# Altium PCB RelayBoard.PcbDoc (part 1 of 2)
Units mm, origin at the board's own origin, x right, y up, seen from the top; angles counter-clockwise.
Board outline 355 x 125 mm, 2 copper layers (Top Layer, Bottom Layer); 146 components, 100 nets, 450 pads, 452 vias.
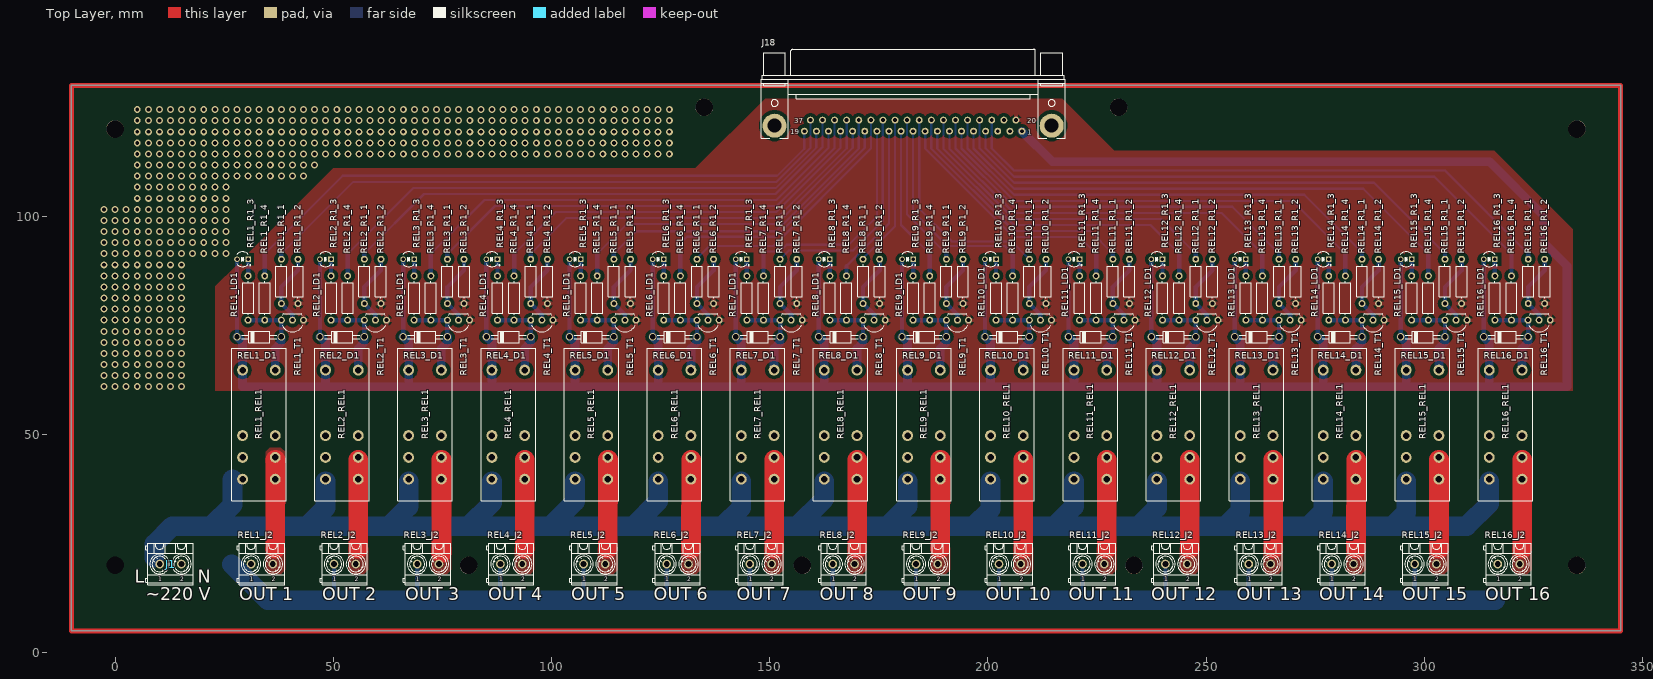
[diagram p0: Top Layer view]
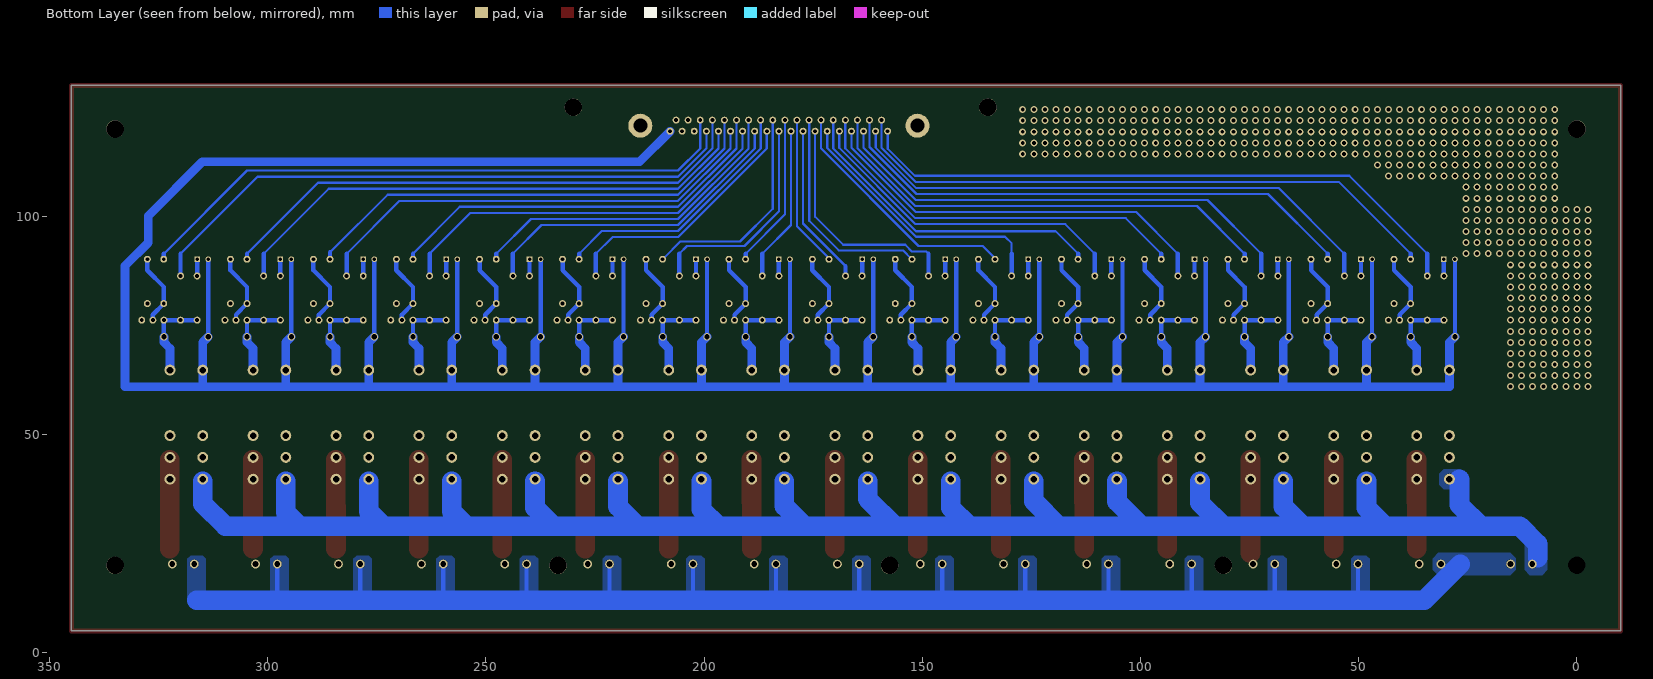
[diagram p1: Bottom Layer view, seen from below]
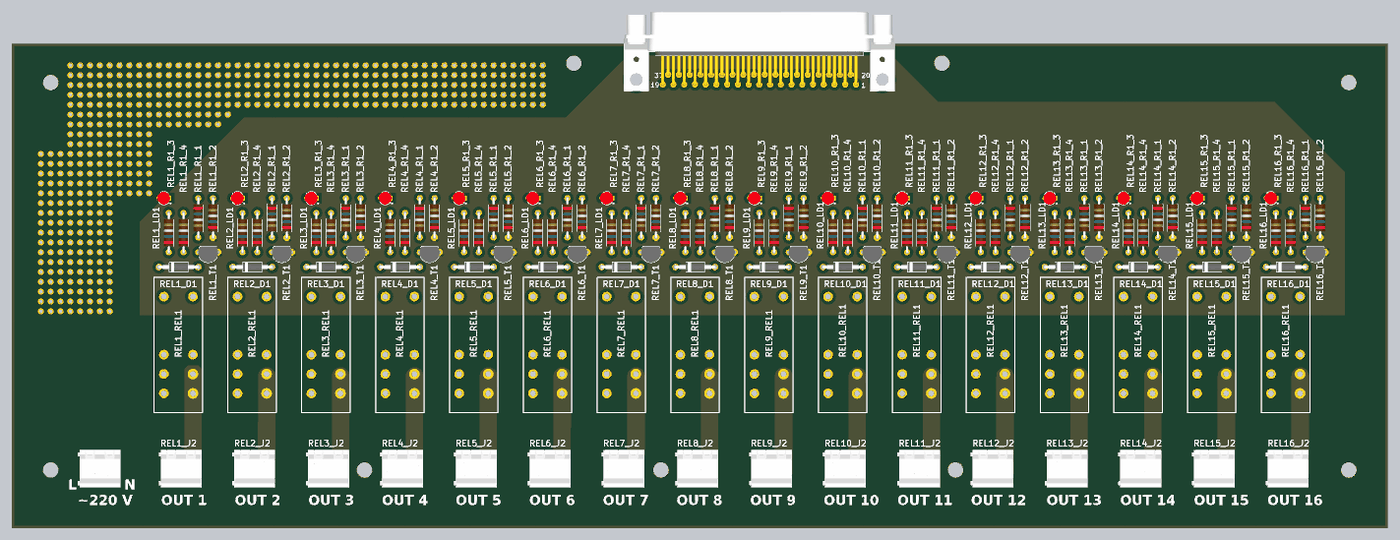
[diagram p3: 3D render of the assembled board from above, using the file's embedded part models]

## Layer stack, top to bottom
Top Solder: solder mask 0.0102, Solder Resist, Dk 3.5
Top Layer: signal copper 0.0356
Dielectric 1: dielectric 0.32, FR-4, Dk 4.8
Bottom Layer: signal copper 0.0356
Bottom Solder: solder mask 0.0102, Solder Resist, Dk 3.5

## Board outline
-10,5 -10,130 345,130 345,5

## Design rules (kind name [scope] priority, off if disabled: settings)
Clearance [InNet('GND')] p1: gap=0.8
PolygonConnect [InNet('GND')] p1: connectstyle=Relief reliefconductorwidth=1 reliefentries=4 polygonreliefangle="90 Angle" airgapwidth=0.5
RoomDefinition REL16 [InComponentClass('REL16')] p1: confinementstyle=ConfineIn formatcopy=TRUE lockcomponents=FALSE outline 310.475,15.24 330.16,15.24 330.16,104.775 310.475,104.775
RoomDefinition REL15 [InComponentClass('REL15')] p2: confinementstyle=ConfineIn formatcopy=TRUE lockcomponents=FALSE outline 291.425,15.24 311.11,15.24 311.11,104.775 291.425,104.775
RoomDefinition REL14 [InComponentClass('REL14')] p3: confinementstyle=ConfineIn formatcopy=TRUE lockcomponents=FALSE outline 272.415,15.24 292.1,15.24 292.1,104.775 272.415,104.775
RoomDefinition REL13 [InComponentClass('REL13')] p4: confinementstyle=ConfineIn formatcopy=TRUE lockcomponents=FALSE outline 253.405,15.24 273.09,15.24 273.09,104.775 253.405,104.775
RoomDefinition REL12 [InComponentClass('REL12')] p5: confinementstyle=ConfineIn formatcopy=TRUE lockcomponents=FALSE outline 234.315,15.24 254,15.24 254,104.775 234.315,104.775
RoomDefinition REL11 [InComponentClass('REL11')] p6: confinementstyle=ConfineIn formatcopy=TRUE lockcomponents=FALSE outline 215.305,15.24 234.99,15.24 234.99,104.775 215.305,104.775
RoomDefinition REL10 [InComponentClass('REL10')] p7: confinementstyle=ConfineIn formatcopy=TRUE lockcomponents=FALSE outline 196.175,15.24 215.86,15.24 215.86,104.775 196.175,104.775
RoomDefinition REL9 [InComponentClass('REL9')] p8: confinementstyle=ConfineIn formatcopy=TRUE lockcomponents=FALSE outline 177.165,15.24 196.85,15.24 196.85,104.775 177.165,104.775
RoomDefinition REL8 [InComponentClass('REL8')] p9: confinementstyle=ConfineIn formatcopy=TRUE lockcomponents=FALSE outline 158.075,15.24 177.76,15.24 177.76,104.775 158.075,104.775
RoomDefinition REL6 [InComponentClass('REL6')] p10: confinementstyle=ConfineIn formatcopy=TRUE lockcomponents=FALSE outline 120.015,15.24 139.7,15.24 139.7,104.775 120.015,104.775
RoomDefinition REL5 [InComponentClass('REL5')] p11: confinementstyle=ConfineIn formatcopy=TRUE lockcomponents=FALSE outline 100.965,15.24 120.65,15.24 120.65,104.775 100.965,104.775
RoomDefinition REL4 [InComponentClass('REL4')] p12: confinementstyle=ConfineIn formatcopy=TRUE lockcomponents=FALSE outline 81.915,15.24 101.6,15.24 101.6,104.775 81.915,104.775
RoomDefinition REL3 [InComponentClass('REL3')] p13: confinementstyle=ConfineIn formatcopy=TRUE lockcomponents=FALSE outline 62.825,15.24 82.51,15.24 82.51,104.775 62.825,104.775
RoomDefinition REL2 [InComponentClass('REL2')] p14: confinementstyle=ConfineIn formatcopy=TRUE lockcomponents=FALSE outline 43.775,15.24 63.46,15.24 63.46,104.775 43.775,104.775
RoomDefinition REL1 [InComponentClass('REL1')] p15: confinementstyle=ConfineIn formatcopy=TRUE lockcomponents=FALSE outline 24.765,15.24 44.45,15.24 44.45,104.775 24.765,104.775
RoomDefinition REL7 [InComponentClass('REL7')] p16: confinementstyle=ConfineIn formatcopy=TRUE lockcomponents=FALSE outline 139.065,15.24 158.75,15.24 158.75,104.775 139.065,104.775
RoutingVias [All] p1: holewidth=0.711 width=1.27 viastyle="Through Hole" minholewidth=0.711 minwidth=1.27 maxholewidth=0.711 maxwidth=1.27
SolderMaskExpansion [All] p1: expansion=0.102
Width [InNetClass('HighCurrent')] p1: maxlimit=5 minlimit=1 preferedwidth=4.5
29 further rules are at their usual default settings.

## Classes and differential pairs
net class R[1..16]: R1 R2 R3 R4 R5 R6 R7 R8 R9 R10 R11 R12 R13 R14 R15 R16
component class REL16: REL16_D1 REL16_J2 REL16_LD1 REL16_R1_1 REL16_R1_2 REL16_R1_3 REL16_R1_4 REL16_REL1 REL16_T1
component class REL15: REL15_D1 REL15_J2 REL15_LD1 REL15_R1_1 REL15_R1_2 REL15_R1_3 REL15_R1_4 REL15_REL1 REL15_T1
component class REL14: REL14_D1 REL14_J2 REL14_LD1 REL14_R1_1 REL14_R1_2 REL14_R1_3 REL14_R1_4 REL14_REL1 REL14_T1
component class REL13: REL13_D1 REL13_J2 REL13_LD1 REL13_R1_1 REL13_R1_2 REL13_R1_3 REL13_R1_4 REL13_REL1 REL13_T1
component class REL12: REL12_D1 REL12_J2 REL12_LD1 REL12_R1_1 REL12_R1_2 REL12_R1_3 REL12_R1_4 REL12_REL1 REL12_T1
component class REL11: REL11_D1 REL11_J2 REL11_LD1 REL11_R1_1 REL11_R1_2 REL11_R1_3 REL11_R1_4 REL11_REL1 REL11_T1
net class LED[1..16]: LED1 LED2 LED3 LED4 LED5 LED6 LED7 LED8 LED9 LED10 LED11 LED12 LED13 LED14 LED15 LED16
channel class OneRealayNode: RELAY1 RELAY2 RELAY3 RELAY4 RELAY5 RELAY6 RELAY7 RELAY8 RELAY9 RELAY10
component class REL10: REL10_D1 REL10_J2 REL10_LD1 REL10_R1_1 REL10_R1_2 REL10_R1_3 REL10_R1_4 REL10_REL1 REL10_T1
component class REL9: REL9_D1 REL9_J2 REL9_LD1 REL9_R1_1 REL9_R1_2 REL9_R1_3 REL9_R1_4 REL9_REL1 REL9_T1
component class REL8: REL8_D1 REL8_J2 REL8_LD1 REL8_R1_1 REL8_R1_2 REL8_R1_3 REL8_R1_4 REL8_REL1 REL8_T1
component class REL7: REL7_D1 REL7_J2 REL7_LD1 REL7_R1_1 REL7_R1_2 REL7_R1_3 REL7_R1_4 REL7_REL1 REL7_T1
component class REL6: REL6_D1 REL6_J2 REL6_LD1 REL6_R1_1 REL6_R1_2 REL6_R1_3 REL6_R1_4 REL6_REL1 REL6_T1
component class REL5: REL5_D1 REL5_J2 REL5_LD1 REL5_R1_1 REL5_R1_2 REL5_R1_3 REL5_R1_4 REL5_REL1 REL5_T1
component class REL4: REL4_D1 REL4_J2 REL4_LD1 REL4_R1_1 REL4_R1_2 REL4_R1_3 REL4_R1_4 REL4_REL1 REL4_T1
component class REL3: REL3_D1 REL3_J2 REL3_LD1 REL3_R1_1 REL3_R1_2 REL3_R1_3 REL3_R1_4 REL3_REL1 REL3_T1
component class REL2: REL2_D1 REL2_J2 REL2_LD1 REL2_R1_1 REL2_R1_2 REL2_R1_3 REL2_R1_4 REL2_REL1 REL2_T1
component class REL1: REL1_D1 REL1_J2 REL1_LD1 REL1_R1_1 REL1_R1_2 REL1_R1_3 REL1_R1_4 REL1_REL1 REL1_T1
component class RelayBoard: J1 J18
net class HighCurrent: AC N NetREL1_J2_2 NetREL2_J2_2 NetREL3_J2_2 NetREL4_J2_2 NetREL5_J2_2 NetREL6_J2_2 NetREL7_J2_2 NetREL8_J2_2 NetREL9_J2_2 NetREL10_J2_2 NetREL11_J2_2 NetREL12_J2_2 NetREL13_J2_2 NetREL14_J2_2 NetREL15_J2_2 NetREL16_J2_2

## Components (designator, comment, footprint, x,y, rotation, side; value= is the part's Value field where it differs from the comment)
J1 "Terminal" WIELAND_25.161.0253.0 12.7,20.32 r0 top
J18 "D-Sub" AMPHENOL_L717DFC37P1ATN 182.88,120.777 r0 top
REL1_D1 "1N4001" DO-41 33.02,72.39 r0 top (schematic designator D1)
REL1_J2 "Terminal" WIELAND_25.161.0253.0 33.655,20.32 r0 top (schematic designator J2)
REL1_LD1 "Red" LED_3MM_RED_1C-2A 29.21,90.17 r180 top (schematic designator LD1)
REL1_R1_1 "1K" RES_ARCOL_RCC025 38.1,85.09 r270 top (schematic designator R1_1)
REL1_R1_2 "100K" RES_ARCOL_RCC025 41.91,85.09 r90 top (schematic designator R1_2)
REL1_R1_3 "510" RES_ARCOL_RCC025 30.48,81.28 r90 top (schematic designator R1_3)
REL1_R1_4 "510" RES_ARCOL_RCC025 34.29,81.28 r90 top (schematic designator R1_4)
REL1_REL1 "Relay" RP78602 29.21,64.77 r0 top (schematic designator REL1)
REL1_T1 "KSP2222A" TO-92AA-P254 40.64,76.2 r180 top (schematic designator T1)
REL2_D1 "1N4001" DO-41 52.03,72.39 r0 top (schematic designator D1)
REL2_J2 "Terminal" WIELAND_25.161.0253.0 52.665,20.32 r0 top (schematic designator J2)
REL2_LD1 "Red" LED_3MM_RED_1C-2A 48.22,90.17 r180 top (schematic designator LD1)
REL2_R1_1 "1K" RES_ARCOL_RCC025 57.11,85.09 r270 top (schematic designator R1_1)
REL2_R1_2 "100K" RES_ARCOL_RCC025 60.92,85.09 r90 top (schematic designator R1_2)
REL2_R1_3 "510" RES_ARCOL_RCC025 49.49,81.28 r90 top (schematic designator R1_3)
REL2_R1_4 "510" RES_ARCOL_RCC025 53.3,81.28 r90 top (schematic designator R1_4)
REL2_REL1 "Relay" RP78602 48.22,64.77 r0 top (schematic designator REL1)
REL2_T1 "KSP2222A" TO-92AA-P254 59.65,76.2 r180 top (schematic designator T1)
REL3_D1 "1N4001" DO-41 71.08,72.39 r0 top (schematic designator D1)
REL3_J2 "Terminal" WIELAND_25.161.0253.0 71.715,20.32 r0 top (schematic designator J2)
REL3_LD1 "Red" LED_3MM_RED_1C-2A 67.27,90.17 r180 top (schematic designator LD1)
REL3_R1_1 "1K" RES_ARCOL_RCC025 76.16,85.09 r270 top (schematic designator R1_1)
REL3_R1_2 "100K" RES_ARCOL_RCC025 79.97,85.09 r90 top (schematic designator R1_2)
REL3_R1_3 "510" RES_ARCOL_RCC025 68.54,81.28 r90 top (schematic designator R1_3)
REL3_R1_4 "510" RES_ARCOL_RCC025 72.35,81.28 r90 top (schematic designator R1_4)
REL3_REL1 "Relay" RP78602 67.27,64.77 r0 top (schematic designator REL1)
REL3_T1 "KSP2222A" TO-92AA-P254 78.7,76.2 r180 top (schematic designator T1)
REL4_D1 "1N4001" DO-41 90.17,72.39 r0 top (schematic designator D1)
REL4_J2 "Terminal" WIELAND_25.161.0253.0 90.805,20.32 r0 top (schematic designator J2)
REL4_LD1 "Red" LED_3MM_RED_1C-2A 86.36,90.17 r180 top (schematic designator LD1)
REL4_R1_1 "1K" RES_ARCOL_RCC025 95.25,85.09 r270 top (schematic designator R1_1)
REL4_R1_2 "100K" RES_ARCOL_RCC025 99.06,85.09 r90 top (schematic designator R1_2)
REL4_R1_3 "510" RES_ARCOL_RCC025 87.63,81.28 r90 top (schematic designator R1_3)
REL4_R1_4 "510" RES_ARCOL_RCC025 91.44,81.28 r90 top (schematic designator R1_4)
REL4_REL1 "Relay" RP78602 86.36,64.77 r0 top (schematic designator REL1)
REL4_T1 "KSP2222A" TO-92AA-P254 97.79,76.2 r180 top (schematic designator T1)
REL5_D1 "1N4001" DO-41 109.22,72.39 r0 top (schematic designator D1)
REL5_J2 "Terminal" WIELAND_25.161.0253.0 109.855,20.32 r0 top (schematic designator J2)
REL5_LD1 "Red" LED_3MM_RED_1C-2A 105.41,90.17 r180 top (schematic designator LD1)
REL5_R1_1 "1K" RES_ARCOL_RCC025 114.3,85.09 r270 top (schematic designator R1_1)
REL5_R1_2 "100K" RES_ARCOL_RCC025 118.11,85.09 r90 top (schematic designator R1_2)
REL5_R1_3 "510" RES_ARCOL_RCC025 106.68,81.28 r90 top (schematic designator R1_3)
REL5_R1_4 "510" RES_ARCOL_RCC025 110.49,81.28 r90 top (schematic designator R1_4)
REL5_REL1 "Relay" RP78602 105.41,64.77 r0 top (schematic designator REL1)
REL5_T1 "KSP2222A" TO-92AA-P254 116.84,76.2 r180 top (schematic designator T1)
REL6_D1 "1N4001" DO-41 128.27,72.39 r0 top (schematic designator D1)
REL6_J2 "Terminal" WIELAND_25.161.0253.0 128.905,20.32 r0 top (schematic designator J2)
REL6_LD1 "Red" LED_3MM_RED_1C-2A 124.46,90.17 r180 top (schematic designator LD1)
REL6_R1_1 "1K" RES_ARCOL_RCC025 133.35,85.09 r270 top (schematic designator R1_1)
REL6_R1_2 "100K" RES_ARCOL_RCC025 137.16,85.09 r90 top (schematic designator R1_2)
REL6_R1_3 "510" RES_ARCOL_RCC025 125.73,81.28 r90 top (schematic designator R1_3)
REL6_R1_4 "510" RES_ARCOL_RCC025 129.54,81.28 r90 top (schematic designator R1_4)
REL6_REL1 "Relay" RP78602 124.46,64.77 r0 top (schematic designator REL1)
REL6_T1 "KSP2222A" TO-92AA-P254 135.89,76.2 r180 top (schematic designator T1)
REL7_D1 "1N4001" DO-41 147.32,72.39 r0 top (schematic designator D1)
REL7_J2 "Terminal" WIELAND_25.161.0253.0 147.955,20.32 r0 top (schematic designator J2)
REL7_LD1 "Red" LED_3MM_RED_1C-2A 143.51,90.17 r180 top (schematic designator LD1)
REL7_R1_1 "1K" RES_ARCOL_RCC025 152.4,85.09 r270 top (schematic designator R1_1)
REL7_R1_2 "100K" RES_ARCOL_RCC025 156.21,85.09 r90 top (schematic designator R1_2)
REL7_R1_3 "510" RES_ARCOL_RCC025 144.78,81.28 r90 top (schematic designator R1_3)
REL7_R1_4 "510" RES_ARCOL_RCC025 148.59,81.28 r90 top (schematic designator R1_4)
REL7_REL1 "Relay" RP78602 143.51,64.77 r0 top (schematic designator REL1)
REL7_T1 "KSP2222A" TO-92AA-P254 154.94,76.2 r180 top (schematic designator T1)
REL8_D1 "1N4001" DO-41 166.33,72.39 r0 top (schematic designator D1)
REL8_J2 "Terminal" WIELAND_25.161.0253.0 166.965,20.32 r0 top (schematic designator J2)
REL8_LD1 "Red" LED_3MM_RED_1C-2A 162.52,90.17 r180 top (schematic designator LD1)
REL8_R1_1 "1K" RES_ARCOL_RCC025 171.41,85.09 r270 top (schematic designator R1_1)
REL8_R1_2 "100K" RES_ARCOL_RCC025 175.22,85.09 r90 top (schematic designator R1_2)
REL8_R1_3 "510" RES_ARCOL_RCC025 163.79,81.28 r90 top (schematic designator R1_3)
REL8_R1_4 "510" RES_ARCOL_RCC025 167.6,81.28 r90 top (schematic designator R1_4)
REL8_REL1 "Relay" RP78602 162.52,64.77 r0 top (schematic designator REL1)
REL8_T1 "KSP2222A" TO-92AA-P254 173.95,76.2 r180 top (schematic designator T1)
REL9_D1 "1N4001" DO-41 185.42,72.39 r0 top (schematic designator D1)
REL9_J2 "Terminal" WIELAND_25.161.0253.0 186.055,20.32 r0 top (schematic designator J2)
REL9_LD1 "Red" LED_3MM_RED_1C-2A 181.61,90.17 r180 top (schematic designator LD1)
REL9_R1_1 "1K" RES_ARCOL_RCC025 190.5,85.09 r270 top (schematic designator R1_1)
REL9_R1_2 "100K" RES_ARCOL_RCC025 194.31,85.09 r90 top (schematic designator R1_2)
REL9_R1_3 "510" RES_ARCOL_RCC025 182.88,81.28 r90 top (schematic designator R1_3)
REL9_R1_4 "510" RES_ARCOL_RCC025 186.69,81.28 r90 top (schematic designator R1_4)
REL9_REL1 "Relay" RP78602 181.61,64.77 r0 top (schematic designator REL1)
REL9_T1 "KSP2222A" TO-92AA-P254 193.04,76.2 r180 top (schematic designator T1)
REL10_D1 "1N4001" DO-41 204.43,72.39 r0 top (schematic designator D1)
REL10_J2 "Terminal" WIELAND_25.161.0253.0 205.065,20.32 r0 top (schematic designator J2)
REL10_LD1 "Red" LED_3MM_RED_1C-2A 200.62,90.17 r180 top (schematic designator LD1)
REL10_R1_1 "1K" RES_ARCOL_RCC025 209.51,85.09 r270 top (schematic designator R1_1)
REL10_R1_2 "100K" RES_ARCOL_RCC025 213.32,85.09 r90 top (schematic designator R1_2)
REL10_R1_3 "510" RES_ARCOL_RCC025 201.89,81.28 r90 top (schematic designator R1_3)
REL10_R1_4 "510" RES_ARCOL_RCC025 205.7,81.28 r90 top (schematic designator R1_4)
REL10_REL1 "Relay" RP78602 200.62,64.77 r0 top (schematic designator REL1)
REL10_T1 "KSP2222A" TO-92AA-P254 212.05,76.2 r180 top (schematic designator T1)
REL11_D1 "1N4001" DO-41 223.56,72.39 r0 top (schematic designator D1)
REL11_J2 "Terminal" WIELAND_25.161.0253.0 224.195,20.32 r0 top (schematic designator J2)
REL11_LD1 "Red" LED_3MM_RED_1C-2A 219.75,90.17 r180 top (schematic designator LD1)
REL11_R1_1 "1K" RES_ARCOL_RCC025 228.64,85.09 r270 top (schematic designator R1_1)
REL11_R1_2 "100K" RES_ARCOL_RCC025 232.45,85.09 r90 top (schematic designator R1_2)
REL11_R1_3 "510" RES_ARCOL_RCC025 221.02,81.28 r90 top (schematic designator R1_3)
REL11_R1_4 "510" RES_ARCOL_RCC025 224.83,81.28 r90 top (schematic designator R1_4)
REL11_REL1 "Relay" RP78602 219.75,64.77 r0 top (schematic designator REL1)
REL11_T1 "KSP2222A" TO-92AA-P254 231.18,76.2 r180 top (schematic designator T1)
REL12_D1 "1N4001" DO-41 242.57,72.39 r0 top (schematic designator D1)
REL12_J2 "Terminal" WIELAND_25.161.0253.0 243.205,20.32 r0 top (schematic designator J2)
REL12_LD1 "Red" LED_3MM_RED_1C-2A 238.76,90.17 r180 top (schematic designator LD1)
REL12_R1_1 "1K" RES_ARCOL_RCC025 247.65,85.09 r270 top (schematic designator R1_1)
REL12_R1_2 "100K" RES_ARCOL_RCC025 251.46,85.09 r90 top (schematic designator R1_2)
REL12_R1_3 "510" RES_ARCOL_RCC025 240.03,81.28 r90 top (schematic designator R1_3)
REL12_R1_4 "510" RES_ARCOL_RCC025 243.84,81.28 r90 top (schematic designator R1_4)
REL12_REL1 "Relay" RP78602 238.76,64.77 r0 top (schematic designator REL1)
REL12_T1 "KSP2222A" TO-92AA-P254 250.19,76.2 r180 top (schematic designator T1)
REL13_D1 "1N4001" DO-41 261.66,72.39 r0 top (schematic designator D1)
REL13_J2 "Terminal" WIELAND_25.161.0253.0 262.295,20.32 r0 top (schematic designator J2)
REL13_LD1 "Red" LED_3MM_RED_1C-2A 257.85,90.17 r180 top (schematic designator LD1)
REL13_R1_1 "1K" RES_ARCOL_RCC025 266.74,85.09 r270 top (schematic designator R1_1)
REL13_R1_2 "100K" RES_ARCOL_RCC025 270.55,85.09 r90 top (schematic designator R1_2)
REL13_R1_3 "510" RES_ARCOL_RCC025 259.12,81.28 r90 top (schematic designator R1_3)
REL13_R1_4 "510" RES_ARCOL_RCC025 262.93,81.28 r90 top (schematic designator R1_4)
REL13_REL1 "Relay" RP78602 257.85,64.77 r0 top (schematic designator REL1)
REL13_T1 "KSP2222A" TO-92AA-P254 269.28,76.2 r180 top (schematic designator T1)
REL14_D1 "1N4001" DO-41 280.67,72.39 r0 top (schematic designator D1)
REL14_J2 "Terminal" WIELAND_25.161.0253.0 281.305,20.32 r0 top (schematic designator J2)
REL14_LD1 "Red" LED_3MM_RED_1C-2A 276.86,90.17 r180 top (schematic designator LD1)
REL14_R1_1 "1K" RES_ARCOL_RCC025 285.75,85.09 r270 top (schematic designator R1_1)
REL14_R1_2 "100K" RES_ARCOL_RCC025 289.56,85.09 r90 top (schematic designator R1_2)
REL14_R1_3 "510" RES_ARCOL_RCC025 278.13,81.28 r90 top (schematic designator R1_3)
REL14_R1_4 "510" RES_ARCOL_RCC025 281.94,81.28 r90 top (schematic designator R1_4)
REL14_REL1 "Relay" RP78602 276.86,64.77 r0 top (schematic designator REL1)
REL14_T1 "KSP2222A" TO-92AA-P254 288.29,76.2 r180 top (schematic designator T1)
REL15_D1 "1N4001" DO-41 299.68,72.39 r0 top (schematic designator D1)
REL15_J2 "Terminal" WIELAND_25.161.0253.0 300.315,20.32 r0 top (schematic designator J2)
REL15_LD1 "Red" LED_3MM_RED_1C-2A 295.87,90.17 r180 top (schematic designator LD1)
REL15_R1_1 "1K" RES_ARCOL_RCC025 304.76,85.09 r270 top (schematic designator R1_1)
REL15_R1_2 "100K" RES_ARCOL_RCC025 308.57,85.09 r90 top (schematic designator R1_2)
REL15_R1_3 "510" RES_ARCOL_RCC025 297.14,81.28 r90 top (schematic designator R1_3)
REL15_R1_4 "510" RES_ARCOL_RCC025 300.95,81.28 r90 top (schematic designator R1_4)
REL15_REL1 "Relay" RP78602 295.87,64.77 r0 top (schematic designator REL1)
REL15_T1 "KSP2222A" TO-92AA-P254 307.3,76.2 r180 top (schematic designator T1)
REL16_D1 "1N4001" DO-41 318.73,72.39 r0 top (schematic designator D1)
REL16_J2 "Terminal" WIELAND_25.161.0253.0 319.365,20.32 r0 top (schematic designator J2)
REL16_LD1 "Red" LED_3MM_RED_1C-2A 314.92,90.17 r180 top (schematic designator LD1)
REL16_R1_1 "1K" RES_ARCOL_RCC025 323.85,85.09 r270 top (schematic designator R1_1)
REL16_R1_2 "100K" RES_ARCOL_RCC025 327.62,85.09 r90 top (schematic designator R1_2)
REL16_R1_3 "510" RES_ARCOL_RCC025 316.19,81.28 r90 top (schematic designator R1_3)
REL16_R1_4 "510" RES_ARCOL_RCC025 320,81.28 r90 top (schematic designator R1_4)
REL16_REL1 "Relay" RP78602 314.92,64.77 r0 top (schematic designator REL1)
REL16_T1 "KSP2222A" TO-92AA-P254 326.35,76.2 r180 top (schematic designator T1)

## Footprints (in the part's own frame and the unit in brackets; to place one, negate y for a bottom-side part, rotate by r counter-clockwise, add the part's x,y. Pads: shape width x height; smd on the part's side, far side on the other; paste and mask are expansions set on the pad)
AMPHENOL_L717DFC37P1ATN [mm] "Right Angled D-Sub 37 Male Contacts with Metal Bracket and Front Female Screwlock (UNC4-40)"
  round 1.6 hole 0.9: 1(24.93,-1.27) 2(22.16,-1.27) 3(19.39,-1.27) 4(16.62,-1.27) 5(13.85,-1.27) 6(11.08,-1.27) 7(8.31,-1.27) 8(5.54,-1.27) 9(2.77,-1.27) 10(0,-1.27) 11(-2.77,-1.27) 12(-5.54,-1.27) 13(-8.31,-1.27) 14(-11.08,-1.27) 15(-13.85,-1.27) 16(-16.62,-1.27) 17(-19.39,-1.27) 18(-22.16,-1.27) 19(-24.93,-1.27) 20(23.56,1.27) 21(20.79,1.27) 22(18.02,1.27) 23(15.25,1.27) 24(12.48,1.27) 25(9.71,1.27) 26(6.94,1.27) 27(4.17,1.27) 28(1.4,1.27) 29(-1.37,1.27) 30(-4.14,1.27) 31(-6.91,1.27) 32(-9.68,1.27) 33(-12.45,1.27) 34(-15.22,1.27) 35(-17.99,1.27) 36(-20.76,1.27) 37(-23.53,1.27)
  round 5.5 hole 3.2: 38(31.75,0) 39(-31.75,0)
  silkscreen extent -34.85,-2.93 34.85,17.47, body extent -34.85,-2.93 34.85,17.47, height 13.45
DO-41 [mm] "DO-41, Diode, Axial, Body 4.7 x 2.7 mm (LxDia. max), Pin spacing 10.16mm"
  round 1.7 hole 1.2: 1(-5.08,0) 2(5.08,0)
  silkscreen extent -4,-1.3 4,1.3, body extent -5.48,-1.3 5.48,1.3, height 2.6
LED_3MM_RED_1C-2A [mm] "LED, Red, Body Dia. 3.43 mm, Pin spacing 2.54mm"
  rect 1.3x1.3 hole 0.8: 1(-1.27,0)
  round 1.3 hole 0.8: 2(1.27,0)
  silkscreen extent -1.85,-1.7 1.34,1.7, body extent -1.71,-1.71 1.72,1.72, height 9.85
RES_ARCOL_RCC025 [mm] "Resistor, Axial, Pad spacing 10.16 mm - Body Lengh 6.3m X Body Diameter 2.4mm"
  round 1.6 hole 0.9: 1(-5.08,0) 2(5.08,0)
  silkscreen extent -3.88,-1.25 3.88,1.25, body extent -5.38,-1.25 5.38,1.25, height 2.5
RP78602 [mm]
  round 2.5 hole 1.5: 1(0,0) 2(0,-15) 3(0,-20) 4(0,-25) 5(7.5,-25) 6(7.5,-20) 7(7.5,-15) 8(7.5,0)
  silkscreen extent -2.5,-30 10,5
TO-92AA-P254 [mm] "TO-92 (TO226), Pitch 2.54mm, Flat Index, 3 In-Line, Bent Leads, Body Dia. 5.3mm"
  round 1.6 hole 0.9: 1(-2.54,0) 2(0,0) 3(2.54,0)
  silkscreen extent -2.36,-1.53 2.37,2.66, body extent -2.81,-1.53 2.81,2.64, height 9.33
WIELAND_25.161.0253.0 [mm] "Terminal Block, Pitch 5mm, 2 Positions, Screw Connection"
  round 2 hole 1.3: 1(-2.5,0) 2(2.5,0)
  silkscreen extent -5.68,-4.75 5.17,4.75, body extent -5.67,-4.75 5.18,4.75, height 15

## Part data
J1 REL1_J2 REL2_J2 REL3_J2 REL4_J2 REL5_J2 REL6_J2 REL7_J2 REL8_J2 REL9_J2 REL10_J2 REL11_J2 REL12_J2 REL13_J2 REL14_J2 REL15_J2 REL16_J2: library part WIELAND_25.161.0253.0, "Terminal Block, 2 Positions, Screw Connection"
J18: library part AMPHENOL_L717DFC37P1ATN, "Connector D-sub 37 Male"
REL1_D1 REL2_D1 REL3_D1 REL4_D1 REL5_D1 REL6_D1 REL7_D1 REL8_D1 REL9_D1 REL10_D1 REL11_D1 REL12_D1 REL13_D1 REL14_D1 REL15_D1 REL16_D1: library part 1N4007, "Diode"
REL1_LD1 REL2_LD1 REL3_LD1 REL4_LD1 REL5_LD1 REL6_LD1 REL7_LD1 REL8_LD1 REL9_LD1 REL10_LD1 REL11_LD1 REL12_LD1 REL13_LD1 REL14_LD1 REL15_LD1 REL16_LD1: library part LED_AVAGO_HLMP-1700, "LED Red 1C 2A"
REL1_R1_1 REL1_R1_2 REL1_R1_3 REL1_R1_4 REL2_R1_1 REL2_R1_2 REL2_R1_3 REL2_R1_4 REL3_R1_1 REL3_R1_2 REL3_R1_3 REL3_R1_4 REL4_R1_1 REL4_R1_2 REL4_R1_3 REL4_R1_4 REL5_R1_1 REL5_R1_2 REL5_R1_3 REL5_R1_4 REL6_R1_1 REL6_R1_2 REL6_R1_3 REL6_R1_4 REL7_R1_1 REL7_R1_2 REL7_R1_3 REL7_R1_4 REL8_R1_1 REL8_R1_2 REL8_R1_3 REL8_R1_4 REL9_R1_1 REL9_R1_2 REL9_R1_3 REL9_R1_4 REL10_R1_1 REL10_R1_2 REL10_R1_3 REL10_R1_4 REL11_R1_1 REL11_R1_2 REL11_R1_3 REL11_R1_4 REL12_R1_1 REL12_R1_2 REL12_R1_3 REL12_R1_4 REL13_R1_1 REL13_R1_2 REL13_R1_3 REL13_R1_4 REL14_R1_1 REL14_R1_2 REL14_R1_3 REL14_R1_4 REL15_R1_1 REL15_R1_2 REL15_R1_3 REL15_R1_4 REL16_R1_1 REL16_R1_2 REL16_R1_3 REL16_R1_4: library part RCF_5K1_5%_0.25W_+10-6PPM_ARCOL_RCC025, "Resistor - 5%"
REL1_T1 REL2_T1 REL3_T1 REL4_T1 REL5_T1 REL6_T1 REL7_T1 REL8_T1 REL9_T1 REL10_T1 REL11_T1 REL12_T1 REL13_T1 REL14_T1 REL15_T1 REL16_T1: library part ZTX653, "NPN Transistor"

## Free pads (board coordinates)
  round 2 hole 4: 1(0,20)
  round 4 hole 4: 1(0,120) 1(81,20) 1(135,125) 1(157.5,20) 1(230,125) 1(233.5,20) 1(335,20) 1(335,120)

## Via types
v1: diameter 1.6, hole 0.9, Top Layer to Bottom Layer, 452 vias

## Nets (pads, with @x,y where several pads share a name; then routed paths per layer and width w, separated by ;. In a path a pad name is that pad's centre, name@x,y a point inside that pad or via, vN(x,y) a via of type N, cw(c..) or ccw(c..) an arc to the next point about the centre after c; other vN are vias at no path point)
AC: J1.1 REL1_REL1.4 REL2_REL1.4 REL3_REL1.4 REL4_REL1.4 REL5_REL1.4 REL6_REL1.4 REL7_REL1.4 REL8_REL1.4 REL9_REL1.4 REL10_REL1.4 REL11_REL1.4 REL12_REL1.4 REL13_REL1.4 REL14_REL1.4 REL15_REL1.4 REL16_REL1.4 | length 500.6
  Bottom Layer w4.5: 9,21.8 9,24.9 13.1,29 22,29 ; 26.9,39.7 26.9,33.9 22,29 ; REL2_REL1.4@48.22,39.27 48.22,33.22 44,29 ; REL3_REL1.4@67.27,39.27 67.27,33.52 62.75,29 ; REL4_REL1.4@86.36,39.27 86.36,34.36 81,29 ; REL5_REL1.4@105.41,39.27 105.41,34.66 99.75,29 ; REL6_REL1.4@124.46,39.27 124.46,34.71 118.75,29 ; REL7_REL1.4@143.51,39.27 143.51,33.26 139.25,29 ; REL8_REL1.4@162.52,39.27 162.52,35.27 156.25,29 ; REL9_REL1.4@181.61,39.27 181.61,33.61 177,29 ; REL10_REL1.4@200.62,39.27 200.62,32.87 196.75,29 ; REL11_REL1.4@219.75,39.27 219.75,33.5 215.25,29 ; REL12_REL1.4@238.76,39.27 238.76,33.26 234.5,29 ; REL13_REL1.4@257.85,39.27 257.85,32.35 254.5,29 ; REL14_REL1.4@276.86,39.27 276.86,32.36 273.5,29 ; REL15_REL1.4@295.87,39.27 295.87,32.12 292.75,29 ; REL16_REL1.4@314.92,39.27 314.92,34.17 309.75,29 292.75,29 ; 22,29 44,29 ; 44,29 62.75,29 ; 62.75,29 81,29 ; 81,29 99.75,29 ; 99.75,29 118.75,29 ; 118.75,29 139.25,29 ; 139.25,29 156.25,29 ; 156.25,29 177,29 ; 177,29 196.75,29 ; 196.75,29 215.25,29 ; 215.25,29 234.5,29 ; 234.5,29 254.5,29 ; 254.5,29 273.5,29 ; 273.5,29 292.75,29
GND: J18.20 REL1_R1_2.1 REL1_T1.1 REL2_R1_2.1 REL2_T1.1 REL3_R1_2.1 REL3_T1.1 REL4_R1_2.1 REL4_T1.1 REL5_R1_2.1 REL5_T1.1 REL6_R1_2.1 REL6_T1.1 REL7_R1_2.1 REL7_T1.1 REL8_R1_2.1 REL8_T1.1 REL9_R1_2.1 REL9_T1.1 REL10_R1_2.1 REL10_T1.1 REL11_R1_2.1 REL11_T1.1 REL12_R1_2.1 REL12_T1.1 REL13_R1_2.1 REL13_T1.1 REL14_R1_2.1 REL14_T1.1 REL15_R1_2.1 REL15_T1.1 REL16_R1_2.1 REL16_T1.1
LED1: J18.4 REL16_R1_4.2 | length 139.4
  Bottom Layer w0.5: J18.4@199.5,119.38 199.5,115.57 205.98,109.09 302.35,109.09 320,91.44
  Bottom Layer w1: REL16_R1_4.2@320,86.36 320,91.44
LED2: J18.5 REL15_R1_4.2 | length 122.9
  Bottom Layer w0.5: J18.5@196.73,119.126 196.73,115.57 205.98,106.32 286.07,106.32 300.95,91.44
  Bottom Layer w1: REL15_R1_4.2@300.95,86.36 300.95,91.44
LED3: J18.6 REL14_R1_4.2 | length 106.6
  Bottom Layer w0.5: J18.6@193.96,119.126 193.96,115.57 205.98,103.55 269.83,103.55 281.94,91.44
  Bottom Layer w1: REL14_R1_4.2@281.94,86.36 281.94,91.44
LED4: J18.7 REL13_R1_4.2 | length 90.4
  Bottom Layer w0.5: J18.7@191.19,119.126 191.19,115.57 205.98,100.78 253.59,100.78 262.93,91.44
  Bottom Layer w1: REL13_R1_4.2@262.93,86.36 262.93,91.44
LED5: J18.8 REL12_R1_4.2 | length 74.1
  Bottom Layer w0.5: J18.8@188.42,119.126 188.42,115.57 205.98,98.01 237.27,98.01 243.84,91.44
  Bottom Layer w1: REL12_R1_4.2@243.84,86.36 243.84,91.44
LED6: J18.9 REL11_R1_4.2 | length 57.8
  Bottom Layer w0.5: J18.9@185.65,119.126 185.65,115.57 205.98,95.24 221.03,95.24 224.83,91.44
  Bottom Layer w1: REL11_R1_4.2@224.83,86.36 224.83,91.44
LED7: J18.10 REL10_R1_4.2 | length 49.9
  Bottom Layer w0.5: J18.10@182.88,119.126 182.88,101.092 190.754,93.218 203.922,93.218 205.7,91.44
  Bottom Layer w1: REL10_R1_4.2@205.7,86.36 205.7,91.44
LED8: J18.11 REL9_R1_4.2 | length 35.5
  Bottom Layer w0.5: J18.11@180.11,119.126 180.11,98.02 186.69,91.44
  Bottom Layer w1: REL9_R1_4.2@186.69,86.36 186.69,91.44
LED9: J18.12 REL8_R1_4.2 | length 36.8
  Bottom Layer w0.5: 167.6,88.606 177.34,98.346 J18.12@177.34,119.126
  Bottom Layer w1: REL8_R1_4.2@167.6,86.36 167.6,88.606
LED10: J18.13 REL7_R1_4.2 | length 53.9
  Bottom Layer w0.5: 148.59,91.44 149.098,91.948 152.4,91.948 153.924,93.472 168.148,93.472 174.57,99.894 J18.13@174.57,119.253
  Bottom Layer w1: REL7_R1_4.2@148.59,86.36 148.59,91.44
LED11: J18.14 REL6_R1_4.2 | length 62.3
  Bottom Layer w0.5: 129.54,91.44 129.54,93.808 131.064,95.332 151.466,95.332 171.8,115.666 J18.14@171.8,119.253
  Bottom Layer w1: REL6_R1_4.2@129.54,86.36 129.54,91.44
LED12: J18.15 REL5_R1_4.2 | length 77.2
  Bottom Layer w0.5: 110.49,91.44 117.272,98.222 151.562,98.222 169.03,115.69 J18.15@169.03,119.253
  Bottom Layer w1: REL5_R1_4.2@110.49,86.36 110.49,91.44
LED13: J18.16 REL4_R1_4.2 | length 93.5
  Bottom Layer w0.5: 91.44,91.44 100.992,100.992 151.538,100.992 166.24,115.694 166.24,119.233 J18.16@166.26,119.253
  Bottom Layer w1: REL4_R1_4.2@91.44,86.36 91.44,91.44
LED14: J18.17 REL3_R1_4.2 | length 109.8
  Bottom Layer w0.5: 72.35,91.44 84.672,103.762 151.514,103.762 163.47,115.718 J18.17@163.47,119.253 ; J18.17@163.47,119.233 J18.17@163.49,119.253
  Bottom Layer w1: REL3_R1_4.2@72.35,86.36 72.35,91.44
LED15: J18.18 REL2_R1_4.2 | length 126.1
  Bottom Layer w0.5: 53.3,91.44 68.392,106.532 151.49,106.532 160.7,115.742 J18.18@160.7,119.253 ; J18.18@160.7,119.233 J18.18@160.72,119.253
  Bottom Layer w1: REL2_R1_4.2@53.3,86.36 53.3,91.44
LED16: J18.19 REL1_R1_4.2 | length 142.5
  Bottom Layer w0.5: 34.29,91.44 52.152,109.302 151.72,109.302 157.93,115.512 J18.19@157.93,119.253 ; J18.19@157.93,119.233 J18.19@157.95,119.253
  Bottom Layer w1: REL1_R1_4.2@34.29,86.36 34.29,91.44
N: J1.2 REL1_J2.1 REL2_J2.1 REL3_J2.1 REL4_J2.1 REL5_J2.1 REL6_J2.1 REL7_J2.1 REL8_J2.1 REL9_J2.1 REL10_J2.1 REL11_J2.1 REL12_J2.1 REL13_J2.1 REL14_J2.1 REL15_J2.1 REL16_J2.1 | length 408.6
  Bottom Layer w1: 50.165,12 REL2_J2.1@50.165,20.32 ; 69.215,13 REL3_J2.1@69.215,20.32 ; 88.305,12 REL4_J2.1@88.305,20.32 ; 107.355,12 REL5_J2.1@107.355,20.32 ; 126.405,12 REL6_J2.1@126.405,20.32 ; 145.455,12 REL7_J2.1@145.455,20.32 ; 164.465,12 REL8_J2.1@164.465,20.32 ; 183.555,12 REL9_J2.1@183.555,20.32 ; 202.565,12 REL10_J2.1@202.565,20.32 ; 221.695,12 REL11_J2.1@221.695,20.32 ; 240.705,12 REL12_J2.1@240.705,20.32 ; 259.795,12 REL13_J2.1@259.795,20.32 ; 278.805,12 REL14_J2.1@278.805,20.32 ; 297.815,12 REL15_J2.1@297.815,20.32 ; REL16_J2.1@316.68,20.32 REL16_J2.1@316.865,20.32
  Bottom Layer w4.5: 26.75,20.25 35,12 316.25,12
NetREL1_D1_2: REL1_D1.2 REL1_R1_3.1 REL1_R1_4.1 REL1_REL1.8 REL1_T1.3 | length 19.6
  Bottom Layer w1: REL1_R1_3.1@30.48,76.2 REL1_R1_4.1@34.29,76.2 REL1_T1.3@38.1,76.2 REL1_D1.2@38.1,72.39
  Bottom Layer w2: REL1_REL1.8@36.71,64.77 36.71,69.73 38.1,71.12 REL1_D1.2@38.1,72.39
NetREL1_J2_2: REL1_J2.2 REL1_REL1.6 | length 20.4
  Top Layer w4.5: 36.735,23.855 REL1_REL1.6@36.75,44.25
NetREL1_LD1_1: REL1_LD1.1 REL1_R1_3.2 | length 3.8
  Bottom Layer w1: REL1_R1_3.2@30.48,86.36 REL1_LD1.1@30.48,90.17
NetREL1_R1_1_2: REL1_R1_1.2 REL1_R1_2.2 REL1_T1.2 | length 16.6
  Bottom Layer w1: REL1_T1.2@40.64,76.2 40.64,77.47 REL1_R1_1.2@38.1,80.01 38.1,83.82 41.91,87.63 REL1_R1_2.2@41.91,90.17
NetREL2_D1_2: REL2_D1.2 REL2_R1_3.1 REL2_R1_4.1 REL2_REL1.8 REL2_T1.3 | length 19.6
  Bottom Layer w1: REL2_R1_3.1@49.49,76.2 REL2_R1_4.1@53.3,76.2 REL2_T1.3@57.11,76.2 REL2_D1.2@57.11,72.39
  Bottom Layer w2: REL2_REL1.8@55.72,64.77 55.72,69.73 57.11,71.12 REL2_D1.2@57.11,72.39
NetREL2_J2_2: REL2_J2.2 REL2_REL1.6 | length 20.4
  Top Layer w4.5: 55.745,23.855 REL2_REL1.6@55.76,44.25
NetREL2_LD1_1: REL2_LD1.1 REL2_R1_3.2 | length 3.8
  Bottom Layer w1: REL2_R1_3.2@49.49,86.36 REL2_LD1.1@49.49,90.17
NetREL2_R1_1_2: REL2_R1_1.2 REL2_R1_2.2 REL2_T1.2 | length 16.6
  Bottom Layer w1: REL2_T1.2@59.65,76.2 59.65,77.47 REL2_R1_1.2@57.11,80.01 57.11,83.82 60.92,87.63 REL2_R1_2.2@60.92,90.17
NetREL3_D1_2: REL3_D1.2 REL3_R1_3.1 REL3_R1_4.1 REL3_REL1.8 REL3_T1.3 | length 19.6
  Bottom Layer w1: REL3_R1_3.1@68.54,76.2 REL3_R1_4.1@72.35,76.2 REL3_T1.3@76.16,76.2 REL3_D1.2@76.16,72.39
  Bottom Layer w2: REL3_REL1.8@74.77,64.77 74.77,69.73 76.16,71.12 REL3_D1.2@76.16,72.39
NetREL3_J2_2: REL3_J2.2 REL3_REL1.6 | length 21.4
  Top Layer w4.5: 74.794,22.86 REL3_REL1.6@74.81,44.25
NetREL3_LD1_1: REL3_LD1.1 REL3_R1_3.2 | length 3.8
  Bottom Layer w1: REL3_R1_3.2@68.54,86.36 REL3_LD1.1@68.54,90.17
NetREL3_R1_1_2: REL3_R1_1.2 REL3_R1_2.2 REL3_T1.2 | length 16.6
  Bottom Layer w1: REL3_T1.2@78.7,76.2 78.7,77.47 REL3_R1_1.2@76.16,80.01 76.16,83.82 79.97,87.63 REL3_R1_2.2@79.97,90.17